# Altium PCB DisplayReceiver.PcbDoc
Units mm, origin at the board's own origin, x right, y up, seen from the top; angles counter-clockwise.
Board outline 70 x 40 mm, 2 copper layers (Top Signal Layer, Bottom Signal Layer), stack 0.325 mm thick; 58 components, 39 nets, 251 pads, 0 vias.
Unrouted connection lines stored in the file: 136.
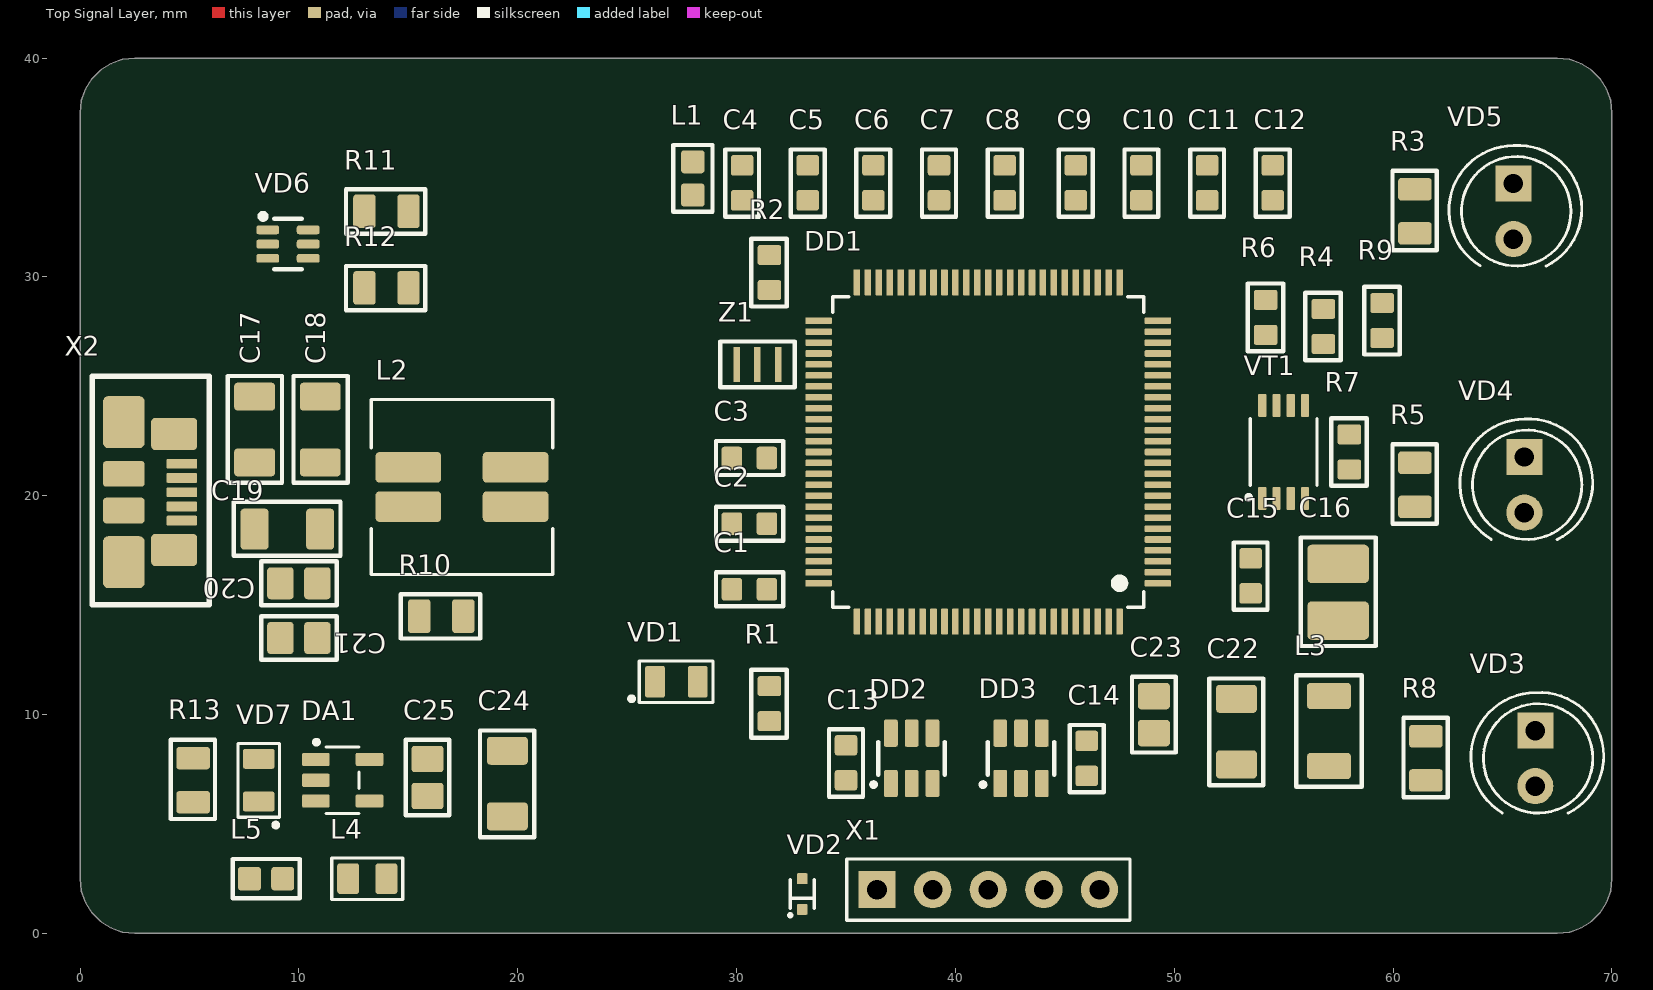
[diagram p0: Top Signal Layer view]
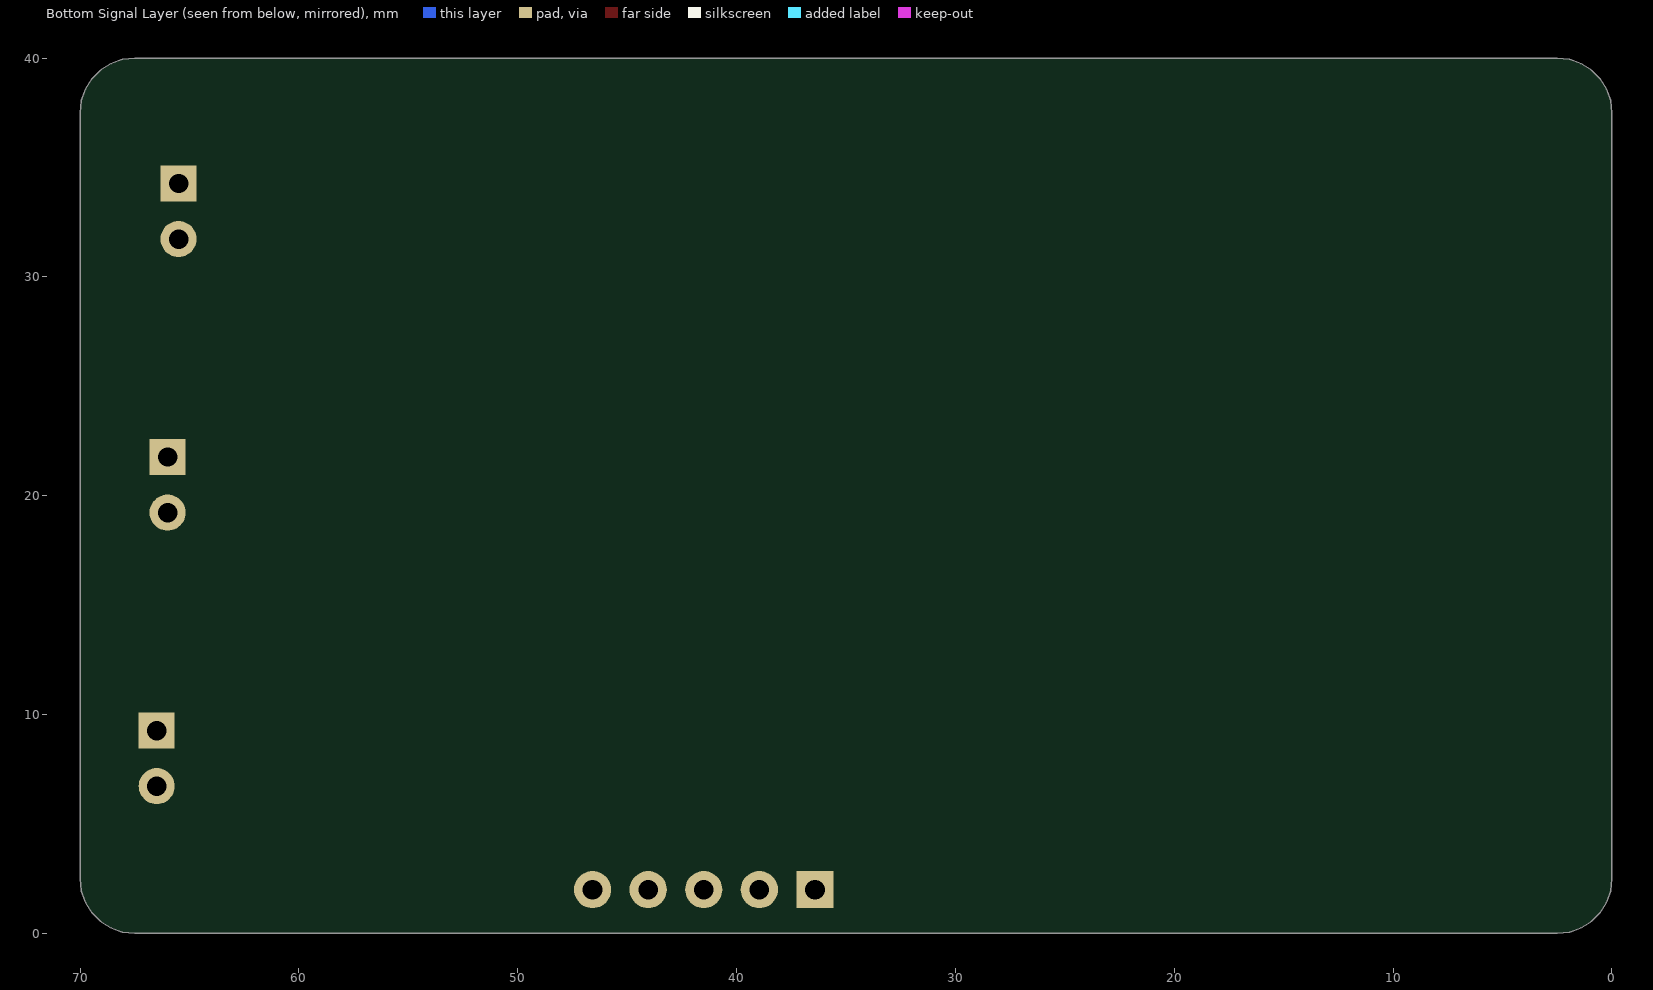
[diagram p1: Bottom Signal Layer view, seen from below]

## Layer stack, top to bottom
Top Solder: solder mask 0.0102, Solder Resist, Dk 3.5
Top Signal Layer: signal copper 0.0356
Dielectric 1: core 0.254, FR-4, Dk 4.2
Bottom Signal Layer: signal copper 0.0356
Bottom Solder: solder mask 0.0102, Solder Resist, Dk 3.5

## Board outline
67.5,40 2.5,40 1.944,39.937 1.415,39.752 0.941,39.455 0.545,39.059 0.248,38.585 0.063,38.056 0,37.5 0,2.5 0.063,1.944 0.248,1.415 0.545,0.941 0.941,0.545 1.415,0.248 1.944,0.063 2.5,0 67.5,0 68.056,0.063 68.585,0.248 69.059,0.545 69.455,0.941 69.752,1.415 69.937,1.944 70,2.5 70,37.5 69.937,38.056 69.752,38.585 69.455,39.059 69.059,39.455 68.585,39.752 68.056,39.937

## Design rules (kind name [scope] priority, off if disabled: settings)
Clearance Clearance_tracks_inner [OnLayer('Power Layer') OR OnLayer('Ground Layer')] p1: gap=0.35 ignorepadtopadclearanceinfootprint=FALSE except(0: Arc-Hole Track-Hole SMDPad-Hole THPad-Hole Via-Hole Fill-Hole Poly-Hole Region-Hole Text-Hole) // Зазоры между проводниками на внутренних слоях
Clearance Clearance_VccGnd [InNet('3,3ВD') vs InNet('DGND')] p2: gap=0.2 ignorepadtopadclearanceinfootprint=FALSE except(0: Arc-Hole Track-Hole SMDPad-Hole THPad-Hole Via-Hole Fill-Hole Poly-Hole Region-Hole Text-Hole; 0.4: THPad-Poly)
Clearance Clearance_VccGnd_1 [InNet('NetVD9_1') vs InNet('DGND')] p3: gap=0.2 ignorepadtopadclearanceinfootprint=FALSE except(0: Arc-Hole Track-Hole SMDPad-Hole THPad-Hole Via-Hole Fill-Hole Poly-Hole Region-Hole Text-Hole; 0.4: THPad-Poly)
Clearance Clearance_VccGnd_2 [InNet('NetVD2_2') vs InNet('DGND')] p4: gap=0.2 ignorepadtopadclearanceinfootprint=FALSE except(0: Arc-Hole Track-Hole SMDPad-Hole THPad-Hole Via-Hole Fill-Hole Poly-Hole Region-Hole Text-Hole; 0.4: THPad-Poly)
Clearance Clearance_VccGnd_5 [InNet('NetVD8_1') vs InNet('DGND')] p5: gap=0.2 ignorepadtopadclearanceinfootprint=FALSE except(0: Arc-Hole Track-Hole SMDPad-Hole THPad-Hole Via-Hole Fill-Hole Poly-Hole Region-Hole Text-Hole; 0.4: THPad-Poly)
Clearance Clearance_VccGnd_3 [InNet('NetVD10_1') vs InNet('DGND')] p6: gap=0.2 ignorepadtopadclearanceinfootprint=FALSE except(0: Arc-Hole Track-Hole SMDPad-Hole THPad-Hole Via-Hole Fill-Hole Poly-Hole Region-Hole Text-Hole; 0.4: THPad-Poly)
Clearance Clearance_VccGnd_4 [InNet('NetVD11_1') vs InNet('DGND')] p7: gap=0.2 ignorepadtopadclearanceinfootprint=FALSE except(0: Arc-Hole Track-Hole SMDPad-Hole THPad-Hole Via-Hole Fill-Hole Poly-Hole Region-Hole Text-Hole; 0.4: THPad-Poly)
Clearance Clearance_VccANGnd [InNet('3,3ВA') vs InNet('AGND')] p8: gap=0.2 ignorepadtopadclearanceinfootprint=FALSE except(0: Arc-Hole Track-Hole SMDPad-Hole THPad-Hole Via-Hole Fill-Hole Poly-Hole Region-Hole Text-Hole; 0.4: THPad-Poly)
Clearance [All] p9: gap=0.2 ignorepadtopadclearanceinfootprint=FALSE except(0: Arc-Hole Track-Hole SMDPad-Hole THPad-Hole Via-Hole Fill-Hole Poly-Hole Region-Hole Text-Hole)
ComponentClearance [All] p1: gap=0.001 collisioncheckmode=3 verticalgap=0 showdistances=FALSE
Height [All] p1: minheight=0 maxheight=100 prefheight=12.7
HoleSize [All] p1: absolutevalues=TRUE maxlimit=10 minlimit=0.3 maxpercent=80.000 minpercent=20.000
MinimumSolderMaskSliver [All] p1: minsoldermaskwidth=0.1
PolygonConnect PolygonConnect_MOTOR1 [InNet('NetA1_16')] p1: connectstyle=Direct reliefconductorwidth=0.254 reliefentries=4 polygonreliefangle="90 Angle" airgapwidth=0.254
PolygonConnect PolygonConnect_MOTOR2 [InNet('NetA1_17')] p2: connectstyle=Direct reliefconductorwidth=0.254 reliefentries=4 polygonreliefangle="90 Angle" airgapwidth=0.254
PolygonConnect PolygonConnect_MOTOR3 [InNet('NetA1_5')] p3: connectstyle=Direct reliefconductorwidth=0.254 reliefentries=4 polygonreliefangle="90 Angle" airgapwidth=0.254
PolygonConnect PolygonConnect_MOTOR4 [InNet('NetA1_4')] p4: connectstyle=Direct reliefconductorwidth=0.254 reliefentries=4 polygonreliefangle="90 Angle" airgapwidth=0.254
PolygonConnect PolygonConnect_SHUNT+ [InNet('8,4В')] p5: connectstyle=Direct reliefconductorwidth=0.254 reliefentries=4 polygonreliefangle="90 Angle" airgapwidth=0.254
PolygonConnect PolygonConnect_SHUNT- [InNet('NetC1_1')] p6: connectstyle=Direct reliefconductorwidth=0.254 reliefentries=4 polygonreliefangle="90 Angle" airgapwidth=0.254
PolygonConnect PolygonConnect_FUSE [InNet('NetFU1_1')] p7: connectstyle=Direct reliefconductorwidth=0.254 reliefentries=4 polygonreliefangle="90 Angle" airgapwidth=0.254
PolygonConnect PolygonConnect_SERVO [InNet('NetX3_1')] p8: connectstyle=Direct reliefconductorwidth=0.254 reliefentries=4 polygonreliefangle="90 Angle" airgapwidth=0.254
PolygonConnect PolygonConnect_Via [IsVia] p9: connectstyle=Direct reliefconductorwidth=0.254 reliefentries=4 polygonreliefangle="90 Angle" airgapwidth=0.2
PolygonConnect [All] p10: connectstyle=Relief reliefconductorwidth=0.6 reliefentries=4 polygonreliefangle="90 Angle" airgapwidth=0.2
RoutingVias [All] p1: holewidth=0.711 width=1.27 viastyle="Through Hole" minholewidth=0.711 minwidth=1.27 maxholewidth=0.711 maxwidth=1.27
ShortCircuit ShortCircuit_ANALOG [InNet('3,3В') vs InNet('3,3ВA')] p1: allowed=TRUE
ShortCircuit [All] p2: allowed=FALSE
SilkToSilkClearance [All] p1: silktosilkclearance=0
SilkToSolderMaskClearance [IsPad] p1: minsilkscreentomaskgap=0 clearancetoexposedcopper=TRUE
SolderMaskExpansion [All] p1: expansion=0.05
Width [All] p1: maxlimit=4 minlimit=0.2 preferedwidth=0.2
Width 3,3В [InNet('3,3В')] p2: maxlimit=2 minlimit=0.2 preferedwidth=1
Width 24В [InNet('24В')] p3: maxlimit=4 minlimit=0.2 preferedwidth=4
Width 5В [InNet('5В')] p4: maxlimit=3 minlimit=0.2 preferedwidth=3
23 further rules are at their usual default settings.

## Classes and differential pairs
component class USBINFRTransiever_Microcontroller: C1 C2 C3 C4 C5 C6 C7 C8 C9 C10 C11 C12 C13 C14 DD1 DD2 DD3 L1 R1 R2 VD1 VD2 X1 Z1
component class USBINFRTransiever_Photodiod: C15 C16 R3 R4 R5 R6 R7 R8 R9 R? VD3 VD4 VD5 VT1
component class USBINFRTransiever_Power: C17 C18 C19 C20 C21 C22 C23 C24 C25 DA1 L2 L3 L4 L5 R10 R11 R12 R13 VD6 VD7 X2

## Components (designator, comment, footprint, x,y, rotation, side; value= is the part's Value field where it differs from the comment)
C1 "Capacitor" C0603 30.586,15.725 r180 top value=0,1мк
C2 "Capacitor" C0603 30.586,18.725 r180 top value=2,2мк
C3 "Capacitor" C0603 30.586,21.725 r180 top value=2,2мк
C4 "Capacitor" C0603 30.25,34.3 r90 top value=0,1мк
C5 "Capacitor" C0603 33.25,34.3 r90 top value=0,1мк
C6 "Capacitor" C0603 36.25,34.3 r90 top value=0,1мк
C7 "Capacitor" C0603 39.25,34.3 r90 top value=0,1мк
C8 "Capacitor" C0603 42.25,34.3 r90 top value=0,1мк
C9 "Capacitor" C0603 45.5,34.3 r90 top value=0,1мк
C10 "Capacitor" C0603 48.5,34.3 r90 top value=0,1мк
C11 "Capacitor" C0603 51.5,34.3 r90 top value=0,1мк
C12 "Capacitor" C0603 54.5,34.3 r90 top value=0,1мк
C13 "Capacitor" C0603 35,7.8 r90 top value=0,1мк
C14 "Capacitor" C0603 46,8 r90 top value=0,1мк
C15 "Capacitor" C0603 53.488,16.34 r90 top value=0,1мк
C16 "Capacitor" C1210 57.488,15.59 r90 top value=10мк
C17 "Capacitor" C1206 8,23 r270 top value=10мк
C18 "Capacitor" C1206 11,23 r270 top value=10мк
C19 "Capacitor" C1206 9.5,18.5 r0 top value=10мк
C20 "Capacitor" C0805 10,16 r0 top value=4,7мк
C21 "Capacitor" C0805 10,13.5 r180 top value=0,1мк
C22 "Capacitor" C1206 52.82,9.25 r90 top value=10мк
C23 "Capacitor" C0805 49.07,10 r90 top value=0,1мк
C24 "Capacitor" C1206 19.5,6.875 r90 top value=10мк
C25 "Capacitor" C0805 15.875,7.125 r90 top value=4,7мк
DA1 "LM3671MF-3.3/NOPB" SOT23-5 12,7 r0 top
DD1 "STM32F407VGT6" LQFP100 41.5,22 r180 top
DD2 "TPD2S017" SOT23-6 38,8 r90 top
DD3 "TPD2S017" SOT23-6 43,8 r90 top
L1 "Inductor" L0603 28,34.5 r90 top
L2 "Dual-Winding Inductor" SRF0703 17.2,20.4 r90 top value=6,8мкГн
L3 "Inductor" L1210 57.07,9.25 r90 top value=2,2мкГн
L4 "Inductor" L0805 13.125,2.5 r0 top
L5 "Inductor" L0603 8.5,2.5 r180 top
R1 "Resistor_0,062Вт" R0603 31.5,10.5 r90 top value=510
R2 "Resistor_0,062Вт" R0603 31.5,30.2 r90 top value=10к
R3 "Resistor_0,125Вт" R0805 61,33 r90 top value=?
R4 "Resistor_0,062Вт" R0603 56.813,27.735 r90 top value=47
R5 "Resistor_0,125Вт" R0805 61,20.5 r90 top value=?
R6 "Resistor_0,062Вт" R0603 54.18,28.149 r90 top value=10к
R7 "Resistor_0,062Вт" R0603 58,22 r90 top value=220
R8 "Resistor_0,125Вт" R0805 61.5,8 r90 top value=?
R9 "Resistor_0,062Вт" R0603 59.5,28.008 r90 top value=10к
R10 "Resistor_0,125Вт" R0805 16.507,14.5 r180 top value=100к
R11 "Resistor_0,125Вт" R0805 14,33 r180 top value=22
R12 "Resistor_0,125Вт" R0805 14,29.5 r180 top value=22
R13 "Resistor_0,125Вт" R0805 5.165,7.002 r90 top value=510
VD1 "LED" L_0805 27.25,11.5 r0 top
VD2 "DiodeSchottky" SOD-523 33,1.8 r90 top
VD3 "LED" RADIAL_5MM 66.5,8 r270 top
VD4 "LED" RADIAL_5MM 66,20.5 r270 top
VD5 "LED" RADIAL_5MM 65.5,33 r270 top
VD6 "USBUF" SOT323-6L 9.5,31.5 r0 top
VD7 "LED" L_0805 8.165,7.002 r90 top
VT1 "IRF7509TRPBF" Micro8 55,22 r90 top
X1 "Header_5_plg" PLS-5 41.5,2 r90 top
X2 "USB MICRO" "USB-B Micro" 3.325,20.162 r0 top
Z1 "QuartzWithCaps" CSTCE 30.95,26 r0 top

## Footprints (in the part's own frame and the unit in brackets; to place one, negate y for a bottom-side part, rotate by r counter-clockwise, add the part's x,y. Pads: shape width x height; smd on the part's side, far side on the other; paste and mask are expansions set on the pad)
C0603 [mm]
  rrect25% 0.94x1.03 smd: 1(-0.8,0) 2(0.8,0)
  silkscreen extent -1.55,-0.77 1.52,0.78, body extent -0.8,-0.4 0.8,0.4, height 0.9
C0805 [mm]
  rrect25% 1.21x1.46 smd paste-5: 1(-0.845,0) 2(0.845,0)
  silkscreen extent -1.73,-1 1.73,1, body extent -1,-0.62 1,0.63, height 0.78
C1206 [mm]
  rrect25% 1.28x1.87 smd: 1(-1.528,-0.024) 2(1.472,-0.024)
  silkscreen extent -2.47,-1.25 2.4,1.23, body extent -1.6,-0.85 1.6,0.85, height 1.75
C1210 [mm]
  rrect25% 1.76x2.82 smd paste-5: 1(-1.295,0) 2(1.295,0)
  silkscreen extent -2.45,-1.73 2.51,1.7, body extent -1.62,-1.27 1.57,1.23, height 1.65
CSTCE [mm]
  rect 0.3x1.6 smd: 1(-0.95,0) 2(0,0) 3(0.95,0)
  silkscreen extent -1.7,-1.05 1.7,1.05, body extent -1.6,-0.65 1.6,0.65, height 1.02
L0603 [mm]
  rrect25% 1.05x1.07 smd paste-5: 1(-0.76,0) 2(0.76,0)
  silkscreen extent -1.53,-0.9 1.53,0.9, body extent -0.8,-0.4 0.8,0.4, height 0.8
L0805 [mm]
  rrect25% 1x1.4 smd: 1(-0.875,0) 2(0.875,0)
  silkscreen extent -1.63,-0.95 1.63,0.95, body extent -1,-0.6 1,0.6, height 0.95
L1210 [mm]
  rrect25% 1.2x2 smd paste-5: 1(-1.6,0) 2(1.6,0)
  silkscreen extent -2.54,-1.5 2.54,1.5, body extent -1.6,-1.25 1.6,1.25, height 1.9
L_0805 [mm] "SMD LED LAMP"
  rrect25% 0.91x1.46 smd: 1(-0.975,0) 2(0.975,0)
  silkscreen extent -2.15,-0.95 1.68,0.95, body extent -1.01,-0.62 1.01,0.63, height 1.1
LQFP100 [mm]
  rrect25% 1.2x0.3 smd: 1(-7.75,6) 2(-7.75,5.5) 3(-7.75,5) 4(-7.75,4.5) 5(-7.75,4) 6(-7.75,3.5) 7(-7.75,3) 8(-7.75,2.5) 9(-7.75,2) 10(-7.75,1.5) 11(-7.75,1) 12(-7.75,0.5) 13(-7.75,0) 14(-7.75,-0.5) 15(-7.75,-1) 16(-7.75,-1.5) 17(-7.75,-2) 18(-7.75,-2.5) 19(-7.75,-3) 20(-7.75,-3.5) 21(-7.75,-4) 22(-7.75,-4.5) 23(-7.75,-5) 24(-7.75,-5.5) 25(-7.75,-6) 51(7.75,-6) 52(7.75,-5.5) 53(7.75,-5) 54(7.75,-4.5) 55(7.75,-4) 56(7.75,-3.5) 57(7.75,-3) 58(7.75,-2.5) 59(7.75,-2) 60(7.75,-1.5) 61(7.75,-1) 62(7.75,-0.5) 63(7.75,0) 64(7.75,0.5) 65(7.75,1) 66(7.75,1.5) 67(7.75,2) 68(7.75,2.5) 69(7.75,3) 70(7.75,3.5) 71(7.75,4) 72(7.75,4.5) 73(7.75,5) 74(7.75,5.5) 75(7.75,6)
  rrect25% 0.3x1.2 smd: 26(-6,-7.75) 27(-5.5,-7.75) 28(-5,-7.75) 29(-4.5,-7.75) 30(-4,-7.75) 31(-3.5,-7.75) 32(-3,-7.75) 33(-2.5,-7.75) 34(-2,-7.75) 35(-1.5,-7.75) 36(-1,-7.75) 37(-0.5,-7.75) 38(0,-7.75) 39(0.5,-7.75) 40(1,-7.75) 41(1.5,-7.75) 42(2,-7.75) 43(2.5,-7.75) 44(3,-7.75) 45(3.5,-7.75) 46(4,-7.75) 47(4.5,-7.75) 48(5,-7.75) 49(5.5,-7.75) 50(6,-7.75) 76(6,7.75) 77(5.5,7.75) 78(5,7.75) 79(4.5,7.75) 80(4,7.75) 81(3.5,7.75) 82(3,7.75) 83(2.5,7.75) 84(2,7.75) 85(1.5,7.75) 86(1,7.75) 87(0.5,7.75) 88(0,7.75) 89(-0.5,7.75) 90(-1,7.75) 91(-1.5,7.75) 92(-2,7.75) 93(-2.5,7.75) 94(-3,7.75) 95(-3.5,7.75) 96(-4,7.75) 97(-4.5,7.75) 98(-5,7.75) 99(-5.5,7.75) 100(-6,7.75)
  silkscreen extent -7.1,-7.1 7.1,7.1, body extent -8.07,-8.07 8.07,8.07, height 1.62
Micro8 [mm]
  rrect25% 1.04x0.38 smd: 1(-2.125,0.975) 2(-2.125,0.325) 3(-2.125,-0.325) 4(-2.125,-0.975) 5(2.125,-0.975) 6(2.125,-0.325) 7(2.125,0.325) 8(2.125,0.975)
  silkscreen extent -2.17,-1.53 1.53,1.7, body extent -2.45,-1.5 2.45,1.5, height 1.15
PLS-5 [mm]
  rect 1.7x1.7 hole 0.9: 1(0,5.08)
  round 1.7 hole 0.9: 2(0,2.54) 3(0,0)
  round 1.7 hole 0.9 mask+0.102: 4(0,-2.54) 5(0,-5.08)
  silkscreen extent -1.4,-6.48 1.4,6.46, body extent -1.27,-6.35 1.28,6.35, height 8.54
R0603 [mm]
  rrect25% 0.92x1.08 smd: 1(-0.8,0) 2(0.8,0)
  silkscreen extent -1.55,-0.8 1.55,0.82, body extent -0.8,-0.4 0.8,0.4, height 0.5
R0805 [mm] "Chip Resistor, 2-Leads, Body 2,10x1,30mm, IPC Medium Density"
  rrect25% 1.02x1.53 smd paste-5: 1(-1.008,0) 2(1.008,0)
  silkscreen extent -1.78,-1 1.85,1.02, body extent -1.1,-0.7 1.1,0.7, height 0.55
RADIAL_5MM [mil]
  rect 65x65 hole 35: 1(-50,0)
  round 65 hole 35: 2(50,0)
  silkscreen extent -118,-116 99,123, body extent -103,-10 119,412, height 256
SOD-523 [mm]
  rrect25% 0.5x0.5 smd: 1(-0.7,0) 2(0.7,0)
  silkscreen extent -1.04,-0.55 0.65,0.62, body extent -0.8,-0.4 0.8,0.4, height 0.7
SOT23-5 [mm]
  rrect25% 1.26x0.61 smd: 1(-1.225,0.95) 2(-1.225,0) 3(-1.225,-0.95) 4(1.225,-0.95) 5(1.225,0.95)
  silkscreen extent -1.3,-1.52 0.75,1.84, body extent -1.6,-1.56 1.6,1.55, height 1.45
SOT23-6 [mm]
  rrect25% 1.24x0.63 smd: 1(-1.15,0.95) 2(-1.15,0) 3(-1.15,-0.95) 4(1.15,-0.95) 5(1.15,0) 6(1.15,0.95)
  silkscreen extent -1.3,-1.52 0.75,1.84, body extent -1.2,-1.4 1.22,1.4, height 1.09
SOT323-6L [mm]
  rrect50% 1.05x0.4 smd: 1(-0.925,0.65) 2(-0.925,0) 3(-0.925,-0.65) 4(0.925,-0.65) 5(0.925,0) 6(0.925,0.65)
  silkscreen extent -1.27,-1.15 0.64,1.39, body extent -1.05,-1 1.05,1, height 0.93
SRF0703 [mm]
  rrect25% 0.5x0.5 on Top Overlay: 0(4.5,4.5)
  rrect25% 1.4x3 smd: 1(0.9,2.2) 2(-0.9,2.2) 3(-0.9,-2.7) 4(0.9,-2.7)
  silkscreen extent -4,-4.4 4,3.9, body extent -3.8,-4.07 3.8,3.53, height 3.4
"USB-B Micro" [mm]
  rrect25% 1.4x0.45 smd: 1(1.325,1.3) 2(1.325,0.65) 3(1.325,0) 4(1.325,-0.65) 5(1.325,-1.3)
  rrect25% 1.9x2.375 smd: 6(-1.325,-3.2) 6(-1.325,3.2)
  rrect25% 1.9x1.175 smd: 6(-1.325,-0.837) 6(-1.325,0.838)
  rrect25% 2.1x1.475 smd: 6(0.975,-2.638) 6(0.975,2.663)
  silkscreen extent -2.76,-5.15 2.58,5.3, body extent -4.03,-3.97 1.4,4, height 2.64

## Part data
C1 C4 C5 C6 C7 C8 C9 C10 C11 C12 C13 C14 C15: library part cap131, "Конденсатор", Manufacture=Murata, Part Name=Ceramic, Part Number=GRM188R71H104K, Voltage=50B, id=cap131, TKE=X7R
C2 C3: library part cap135, "Конденсатор", Manufacture=Murata, Part Name=Ceramic, Part Number=GRM188R71A225KE15D, Voltage=50B, id=cap135, TKE=X7R
C16: library part cap194, "Конденсатор", Manufacture=Murata, Part Name=Ceramic, Part Number=GRM32ER61A106K, Voltage=25В, id=cap194, TKE=X7R
C17 C18 C19 C22 C24: library part cap187, "Конденсатор", Manufacture=Murata, Part Name=Ceramic, Part Number=GRM31CR71E106KA12L*, Voltage=25В, id=cap187, TKE=X7R
C20 C25: library part cap154, "Конденсатор", Manufacture=Murata, Part Name=Ceramic, Part Number=GRM21BR61E475KA12L, Voltage=25B, id=cap154, TKE=X5R
C21 C23: library part cap142, "Конденсатор", Manufacture=Murata, Part Name=Ceramic, Part Number=GRM21BR71H104K**, Voltage=50B, id=cap142, TKE=X7R
DA1: library part pwr2, "Step-Down DC-DC Converter", Current=0,6A, Input Voltage="2,7 - 5,5B", Manufacturer="Texas Instruments", Output Voltage=3,3B, Part Name="600-mA Step-Down DC-DC Converter", id=pwr2, Part Number=LM3671MF-3.3/NOPB, Type=Impulse
DD1: library part microcont6, "Микроконтроллер STM32F407VGT6", Frequency=168MHz, Part Name=Microcontroller, Power Supply=1.8-3.6V, ADC=16x12b/2x12b, Flash=1Mb, id=microcont6, Interface="can, eth, i2c, irda, lin, spi, uart, usbotg", Part Number=STM32F407VGT6, Pin in=82
DD2 DD3: library part diode20, "EMI Filter", Capacitance=1pF, Manufacture="Texas Instruments", Max Reverse Voltage=12B, Part Name="ESD Suppressors", Part Number=TPD2S017DBVR, id=diode20, Number of Channels=2
L1 L5: library part ind0, "EMI Suppression Filter", Part Name="EMI Suppression Filters", Part Number=BLM18PG181SN1D, Rated Current=1,5A, Resistance=0,09Ohm, id=ind0
L2: library part ind15, "Синфазный дроссель", Manufacture=Bourns, Part Name="Dual-Winding Shielded Power Inductors", Part Number=SRF0703-6R8M, Rated Current=2,55A, Resistance=0.0658Ohm, Saturation Current=3,12A, id=ind15
L3: library part ind1, "EMI Suppression Filter", Part Number=NLCV32T-2R2M-EF, Rated Current=0,77A, Resistance=0,13Ohm, id=ind1, Part Name=Inductor, q-factor=10
L4: library part ind4, "EMI Suppression Filter", Manufacture=Mouser, Part Number=MLF2012A2R2KT000, Resistance=500mOhm, id=ind4, Part Name=Inductor
R1: library part res452, "Резистор", Manufacture=Yageo, Part Name=Resistor, Part Number=RC0603FR-07510RL, Power=0,062Вт, Accuracy=1%, id=res452
R2 R6 R9: library part res483, "Резистор", Manufacture=Yageo, Part Name=Resistor, Part Number=RC0603FR-0710KL, Power=0,062Вт, Accuracy=1%, id=res483
R3 R5 R8 R11 R12: library part res33, "Резистор", Manufacture=Yageo, Part Name=Resistor, Part Number=RC0805FR-0722RL, Power=0,125Вт, Accuracy=1%, id=res33
R4: library part res427, "Резистор", Manufacture=Yageo, Part Name=Resistor, Part Number=RC0603FR-0747RL, Power=0,062Вт, Accuracy=1%, id=res427
R7: library part res443, "Резистор", Manufacture=Yageo, Part Name=Resistor, Part Number=RC0603FR-07220RL, Power=0,062Вт, Accuracy=1%, id=res443
R10: library part res121, "Резистор", Manufacture=Yageo, Part Name=Resistor, Part Number=RC0805FR-07100KL, Power=0,125Вт, Accuracy=1%, id=res121
R13: library part res66, "Резистор", Manufacture=Yageo, Part Name=Resistor, Part Number=RC0805FR-07510RL, Power=0,125Вт, Accuracy=1%, id=res66
VD1 VD7: library part diode8, "Светодиод", Part Number=KP-2012EC, id=diode8, Part Name=LED
VD2: library part diode21, "Диод Шоттки", Breakdown Current=600uA, Capacitance=25pF, Forward Current=1А, Forward Voltage=0,62B, Manufacture="NXP Semiconductor", Max Reverse Voltage=20B, Part Name="Diode Schottky", Part Number=PMEG2010AEB.115, id=diode21, Number of Channels=1
VD3 VD4 VD5: library part diode24, "Светодиод", Forward Current=100mA, Forward Voltage=1,35-2,2B, Manufacture=Vishay, Max Power dissipation=160mW, Max Reverse Voltage=5B, Part Name="High Power Infrared Emitting Diode", Part Number=TSAL6200, Radiant power=40mW, Surge Forward Current="1,5A(impulse - 100us)", Angle of half intensity=(+-)17, id=diode24, Number of Channels=1, Peak wavelength=940nm, Radiant intensity=72-600mW/sr
VD6: library part diode23, "EMEMI filter and line termination for USB upstream ports", Capacitance=47pF, Manufacture="ST Microelectronics", Part Name="EMI filter for USB upstream ports", Part Number=USBUF02W6, id=diode23, Number of Channels=2
VT1: library part trans3, "Комплементарная сборка МОП", Continuous drain current=2A, Gate-to-source voltage=(+-)20B, Manufacturer="International Rectifier", Part Name="Dual Transistor", Power dissipation=1,25W, Pulsed drain current=16A, id=trans3, Part Number=IRF7509TRPBF, Rds=0,11Ohm, Structure=n-p-channel, V drain-source max=30B
X1: library part connect6, "Разъем - 5 конт. вилка", Manufacture="Ningbo connfly electronic", Part Name=PLS-5, Part Number=DS1021-1*5SF112-B, Contact_1=+3,3B, Contact_2=SWCLK, Contact_3=GND, Contact_4=SWDIO, Contact_5=RESET, Etch=2,54mm, id=connect6
X2: library part connect2, Part Name="Micro USB 5S-B", Part Number=KLS1-233-0-0-1-T, Contact_1=VCC, Contact_2=D-, Contact_3=D+, Contact_4=ID, Contact_5=GND, Contact_6=Shell, id=connect2
Z1: library part crystal5, "Кварцевый резорнатор со встроенными нагрузочными конденсаторами", Frequence=12MHz, Manufacture=Murata, Part Number=CSTCE12M0G52-R0, id=crystal5

## Nets (pads, with @x,y where several pads share a name; then routed paths per layer and width w, separated by ;. In a path a pad name is that pad's centre, name@x,y a point inside that pad or via, vN(x,y) a via of type N, cw(c..) or ccw(c..) an arc to the next point about the centre after c; other vN are vias at no path point)
3,3B: C6.2 C7.2 C8.2 C9.2 C10.2 C11.2 C12.2 C13.2 C14.2 DD1.6 DD1.11 DD1.19 DD1.28 DD1.50 DD1.75 DD1.100 DD2.5 DD3.5 L1.2 R2.2 VD2.2
3,3В: C24.2 DA1.4 L4.2 VD7.2
5В: C19.2 C20.2 C21.2 C25.2 DA1.1 DA1.3 DD1.68 L2.2 L3.1 VD6.2
5ВL: C22.2 C23.2 L3.2 R7.2
5ВUSB: C17.2 C18.2 L2.1 X2.1
ACT_LED: DD1.36 VD1.2
DGND: C1.1 C2.1 C3.1 C4.1 C5.1 C6.1 C7.1 C8.1 C9.1 C10.1 C11.1 C12.1 C13.1 C14.1 C24.1 DD1.10 DD1.20 DD1.27 DD1.74 DD1.94 DD1.99 DD2.2 DD3.2 L5.2 R1.1 R13.1 X1.3 Z1.2
MCU_RESET: C1.2 DD1.14 DD3.1 R2.1
MCU_SWCLK: DD1.76 DD2.6
MCU_SWDIO: DD1.72 DD2.1
NetC2_2: C2.2 DD1.49
NetC3_2: C3.2 DD1.73
NetC4_2: C4.2 C5.2 DD1.21 DD1.22 L1.1
NetC15_2: C15.2 C16.2 R7.1 R9.1 VT1.3
NetDA1_5: DA1.5 L4.1
NetDD1_12: DD1.12 Z1.3
NetDD1_13: DD1.13 Z1.1
NetDD1_69: DD1.69 R10.2 X2.4
NetDD1_70: DD1.70 VD6.4
NetDD1_71: DD1.71 VD6.6
NetDD1_95: DD1.95 R4.1
NetDD2_3: DD2.3 X1.4
NetDD2_4: DD2.4 X1.2
NetDD3_3: DD3.3 X1.5
NetR1_2: R1.2 VD1.1
NetR3_1: R3.1 VD3.2
NetR3_2: R3.2 R5.2 R8.2 VT1.5 VT1.6
NetR4_2: R4.2 R6.2 VT1.2
NetR5_1: R5.1 VD4.2
NetR8_1: R8.1 VD5.2
NetR9_2: R9.2 VT1.4 VT1.7 VT1.8
NetR11_1: R11.1 X2.3
NetR11_2: R11.2 VD6.1
NetR12_1: R12.1 X2.2
NetR12_2: R12.2 VD6.3
NetR13_2: R13.2 VD7.1
NetVD2_1: VD2.1 X1.1
PGND: C15.1 C16.1 C19.1 C20.1 C21.1 C22.1 C23.1 C25.1 DA1.2 L2.4 L5.1 R6.1 VD3.1 VD4.1 VD5.1 VT1.1
UGND: C17.1 C18.1 L2.3 R10.1 X2.5 X2.6
pads on no net: DD1.1 DD1.2 DD1.3 DD1.4 DD1.5 DD1.7 DD1.8 DD1.9 DD1.15 DD1.16 DD1.17 DD1.18 DD1.23 DD1.24 DD1.25 DD1.26 DD1.29 DD1.30 DD1.31 DD1.32 DD1.33 DD1.34 DD1.35 DD1.37 DD1.38 DD1.39 DD1.40 DD1.41 DD1.42 DD1.43 DD1.44 DD1.45 DD1.46 DD1.47 DD1.48 DD1.51 DD1.52 DD1.53 DD1.54 DD1.55 DD1.56 DD1.57 DD1.58 DD1.59 DD1.60 DD1.61 DD1.62 DD1.63 DD1.64 DD1.65 DD1.66 DD1.67 DD1.77 DD1.78 DD1.79 DD1.80 DD1.81 DD1.82 DD1.83 DD1.84 DD1.85 DD1.86 DD1.87 DD1.88 DD1.89 DD1.90 DD1.91 DD1.92 DD1.93 DD1.96 DD1.97 DD1.98 DD3.4 DD3.6 L2.0 VD6.5